# Altium PCB E53_Size.PcbDoc
Units mil, origin at the board's own origin, x right, y up, seen from the top; angles counter-clockwise.
Board outline 2002 x 1197 mil, 2 copper layers (Top Layer, Bottom Layer); 3 components, 12 nets, 19 pads, 0 vias.
Unrouted connection lines stored in the file: 32.
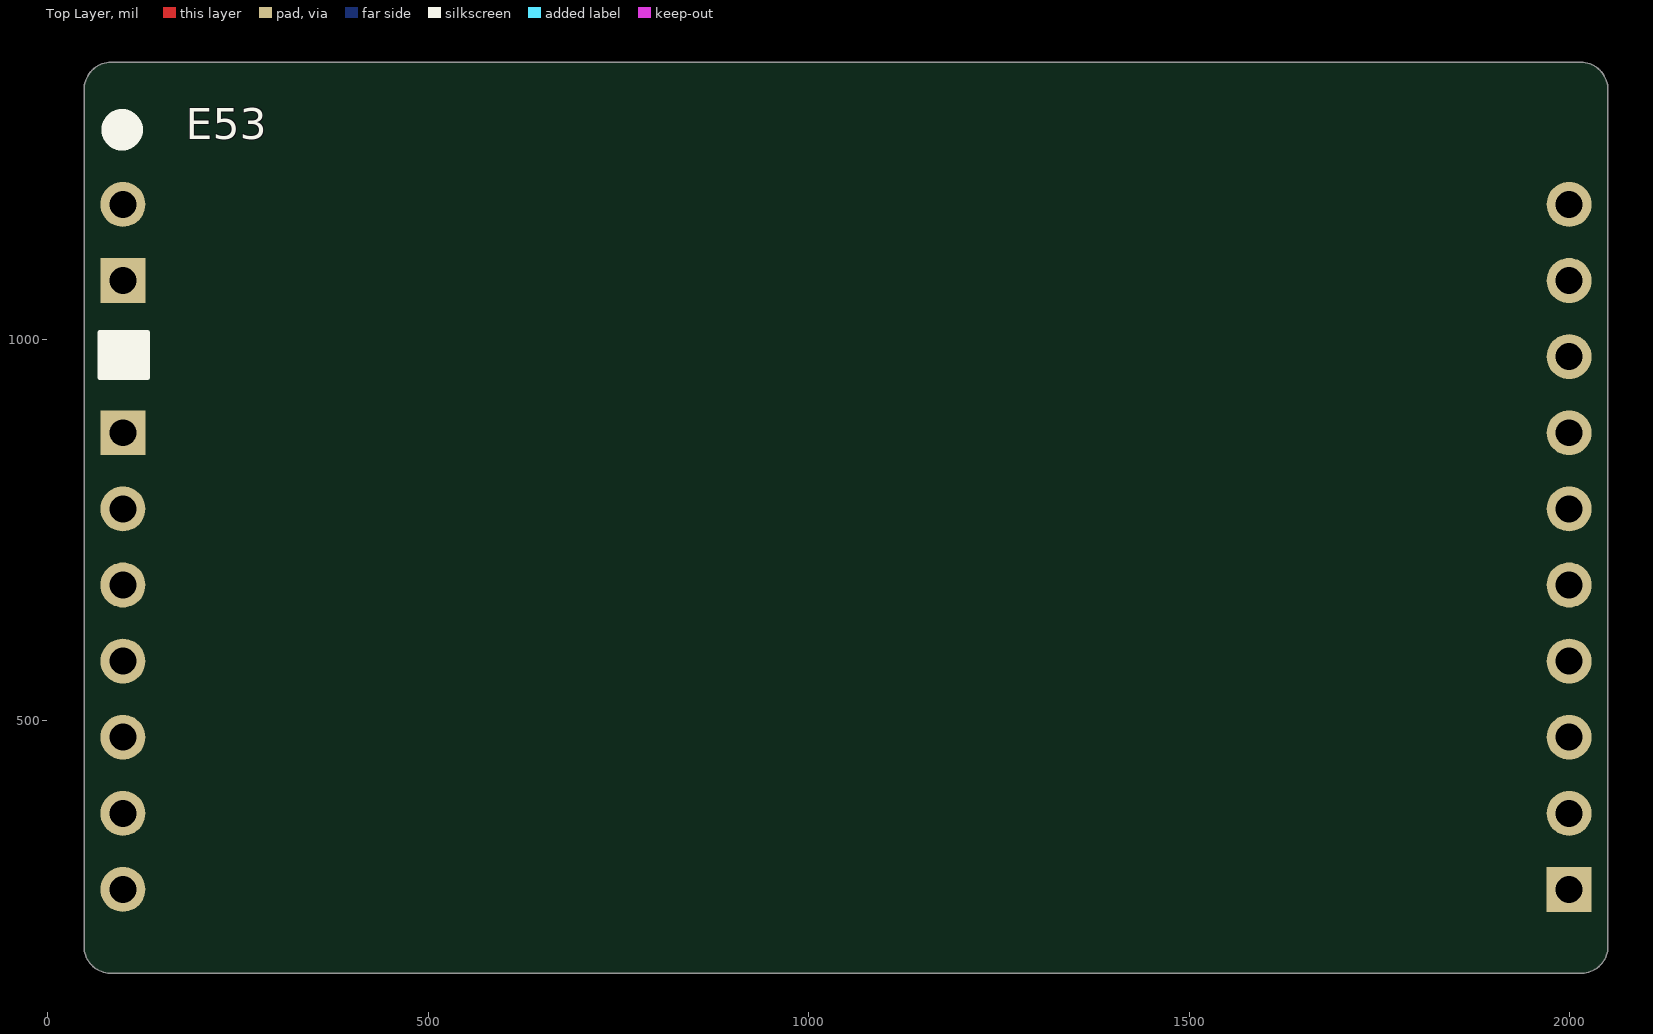
[diagram p0: Top Layer view]
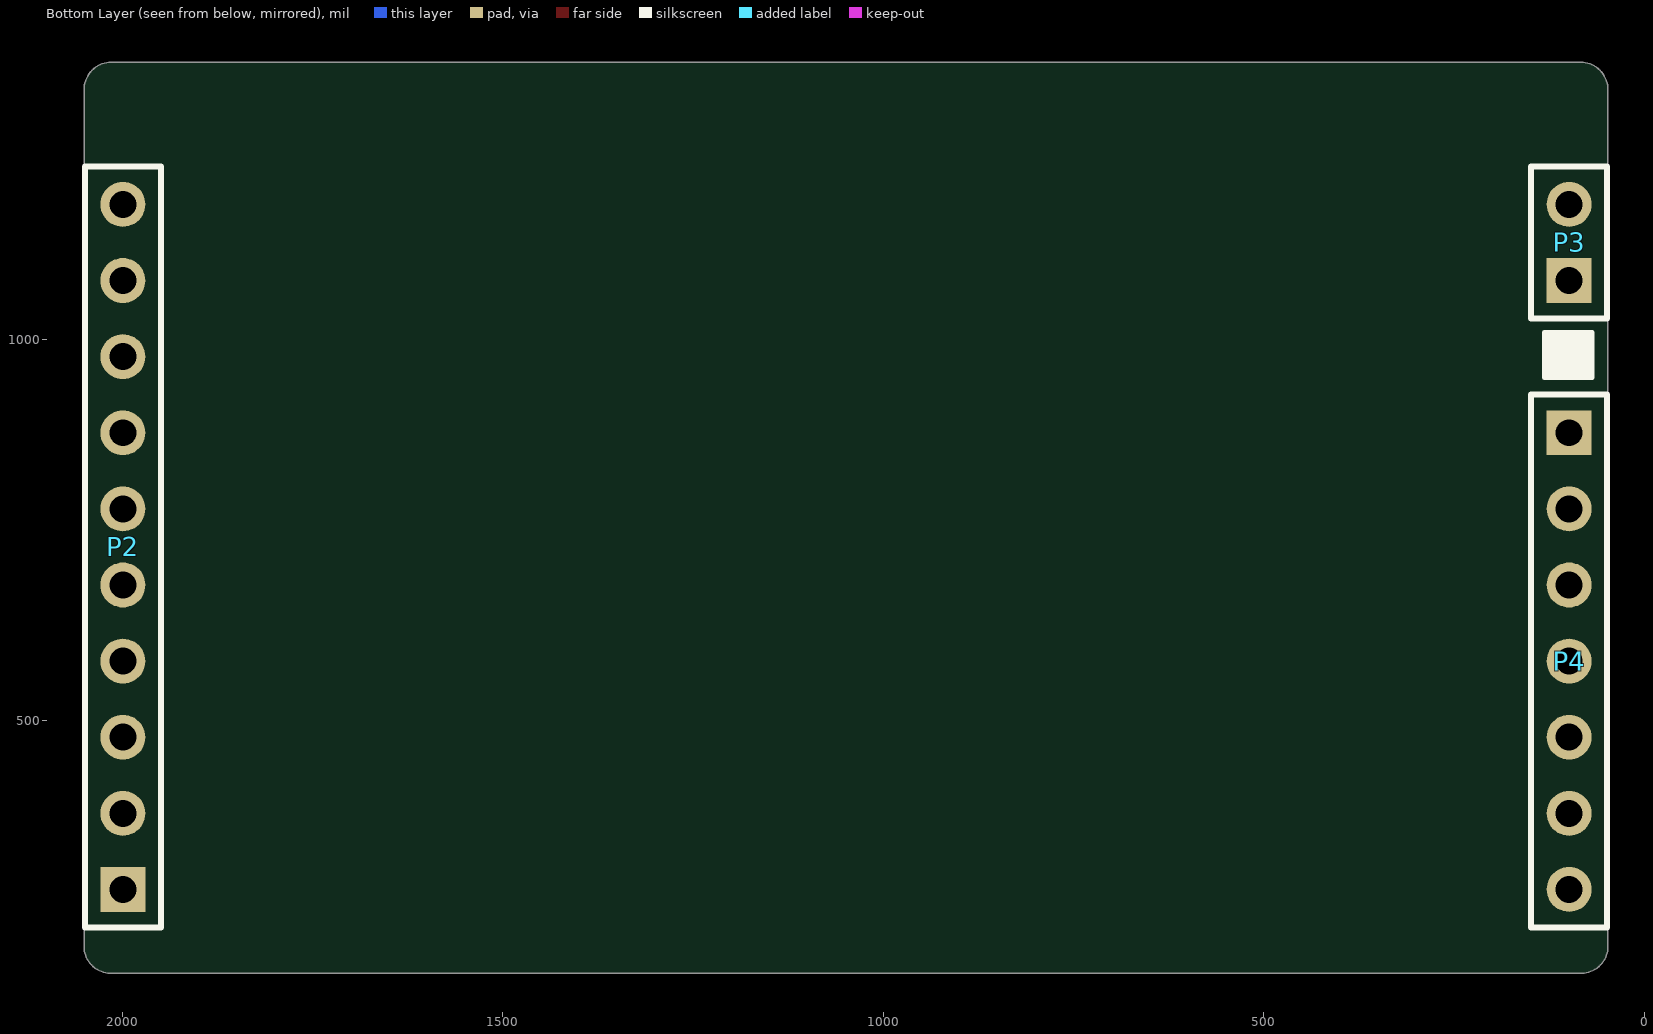
[diagram p1: Bottom Layer view, seen from below]

## Layer stack, top to bottom
Top Solder: solder mask 0.4, Solder Resist, Dk 3.5
Top Layer: signal copper 1.4
Dielectric 1: dielectric 12.6, FR-4, Dk 4.8
Bottom Layer: signal copper 1.4
Bottom Solder: solder mask 0.4, Solder Resist, Dk 3.5

## Board outline
48,203 ccw(c83.02,202.52) 82.54,167.5 2015.46,167.5 ccw(c2014.98,202.52) 2050,203 2050,1327.5 ccw(c2013.5,1328) 2014,1364.5 84,1364.5 ccw(c84.5,1328) 48,1327.5

## Design rules (kind name [scope] priority, off if disabled: settings)
Clearance Clearance_1 [IsRegion vs InNet('GND')and InPolygon] p1: gap=15 ignorepadtopadclearanceinfootprint=FALSE
Clearance NET_TO_POLYGON [InNet('NetL2_1')   Or InNet('NetAnt1_1') vs InPolygon] p2: gap=15 ignorepadtopadclearanceinfootprint=FALSE except(0: Arc-Hole Track-Hole SMDPad-Hole THPad-Hole Via-Hole Fill-Hole Poly-Hole Region-Hole Text-Hole)
Clearance [All] p3: gap=6 ignorepadtopadclearanceinfootprint=FALSE
ComponentClearance [All] p1 off: gap=10 collisioncheckmode=3 verticalgap=10 showdistances=FALSE
PolygonConnect PolygonConnect_1 [All vs InComponent('Ant1')] p1: connectstyle=Direct reliefconductorwidth=10 reliefentries=4 polygonreliefangle="90 Angle" airgapwidth=10
PolygonConnect [All] p2: thpad.connectstyle=Relief thpad.reliefconductorwidth=10 thpad.reliefentries=4 thpad.polygonreliefangle="45 Angle" thpad.airgapwidth=10 smdpad.connectstyle=Relief smdpad.reliefconductorwidth=15 smdpad.reliefentries=4 smdpad.polygonreliefangle="90 Angle" smdpad.airgapwidth=10 via.connectstyle=Direct via.reliefconductorwidth=10 via.reliefentries=4 via.polygonreliefangle="45 Angle" via.airgapwidth=10
RoutingVias [All] p1: holewidth=28 width=50 viastyle="Through Hole" minholewidth=28 minwidth=50 maxholewidth=28 maxwidth=50
SolderMaskExpansion [All] p1: expansion=4
Width [All] p1: maxlimit=100 minlimit=6 preferedwidth=10 minimp=50.000000 maximp=50.000000 favimp=50.000000
29 further rules are at their usual default settings.

## Classes and differential pairs
component class E53_SC2: P2 P3

## Components (designator, comment, footprint, x,y, rotation, side; value= is the part's Value field where it differs from the comment)
P2 "Header 10" HDR1X10 1999,277.5 r90 bottom
P3 "Header 2" HDR1X2 99,1077.5 r90 bottom
P4 "Header 7" HDR1X7 99,877.5 r270 bottom

## Footprints (in the part's own frame and the unit in brackets; to place one, negate y for a bottom-side part, rotate by r counter-clockwise, add the part's x,y. Pads: shape width x height; smd on the part's side, far side on the other; paste and mask are expansions set on the pad)
HDR1X2 [mm] "Connector; Header; 2 Position"
  rect 1.5x1.5 hole 0.9: 1(0,0)
  round 1.5 hole 0.9: 2(2.54,0)
  silkscreen extent -1.27,-1.27 3.81,1.27, body extent -1.27,-1.27 3.81,1.27, height 8.54
HDR1X7 [mm] "Connector; Header; 7 Position"
  rect 1.5x1.5 hole 0.9: 1(0,0)
  round 1.5 hole 0.9: 2(2.54,0) 3(5.08,0) 4(7.62,0) 5(10.16,0) 6(12.7,0) 7(15.24,0)
  silkscreen extent -1.27,-1.27 16.51,1.27, body extent -1.27,-1.27 16.51,1.27, height 8.54
HDR1X10 [mm] "Connector; Header; 10 Position"
  rect 1.5x1.5 hole 0.9: 1(0,0)
  round 1.5 hole 0.9: 2(2.54,0) 3(5.08,0) 4(7.62,0) 5(10.16,0) 6(12.7,0) 7(15.24,0) 8(17.78,0) 9(20.32,0) 10(22.86,0)
  silkscreen extent -1.27,-1.27 24.13,1.27

## Part data
P2: "Header, 10-Pin", LatestRevisionDate=17-Jul-2002, LatestRevisionNote="Re-released for DXP Platform.", Publisher="Altium Limited"
P3: "Header, 2-Pin", LatestRevisionDate=17-Jul-2002, LatestRevisionNote="Re-released for DXP Platform.", Publisher="Altium Limited"
P4: "Header, 7-Pin", LatestRevisionDate=17-Jul-2002, LatestRevisionNote="Re-released for DXP Platform.", Publisher="Altium Limited"

## Nets (pads, with @x,y where several pads share a name; then routed paths per layer and width w, separated by ;. In a path a pad name is that pad's centre, name@x,y a point inside that pad or via, vN(x,y) a via of type N, cw(c..) or ccw(c..) an arc to the next point about the centre after c; other vN are vias at no path point)
24CXX_SCL: P4.6
24CXX_SDA: P4.7
GND: P2.2 P2.4
LED_SW1: P4.4
LED_SW2: P4.5
MEMS_INT: P4.1
NetC1_1: 
NetC6_2: 
NetD1_1: 
NetD2_1: 
NetEP1_1: 
V3.3: P2.3
pads on no net: P2.1 P2.5 P2.6 P2.7 P2.8 P2.9 P2.10 P3.1 P3.2 P4.2 P4.3

## Silkscreen, mask and mechanical layers (free items; w line width, h text height)
Top Overlay:
  circle w40: c98,1275.5 r7.21
  rectangle: 68.33,949.5 131.5,1009.5
  lines w6: 68.33,949.5 131.5,949.5 131.5,1009.5 68.33,1009.5 68.33,949.5
  text "E53" at 181.5,1249.5 h70
Bottom Overlay:
  rectangle: 68.33,949.5 131.5,1009.5
  lines w6: 68.33,949.5 68.33,1009.5 131.5,1009.5 131.5,949.5 68.33,949.5
Mechanical 1:
  lines w6: 2014,1364.5 ccw(c2014,1364.5) 2014,1364.5 ; 2014,1364.5 cw(c2013.5,1328) 2050,1327.5 2050,203 cw(c2014.98,202.52) 2015.46,167.5 82.54,167.5 cw(c83.02,202.52) 48,203 48,1327.5 cw(c84.5,1328) 84,1364.5 2014,1364.5